# EAGLE board TLC5971 (EAGLE 6.4)
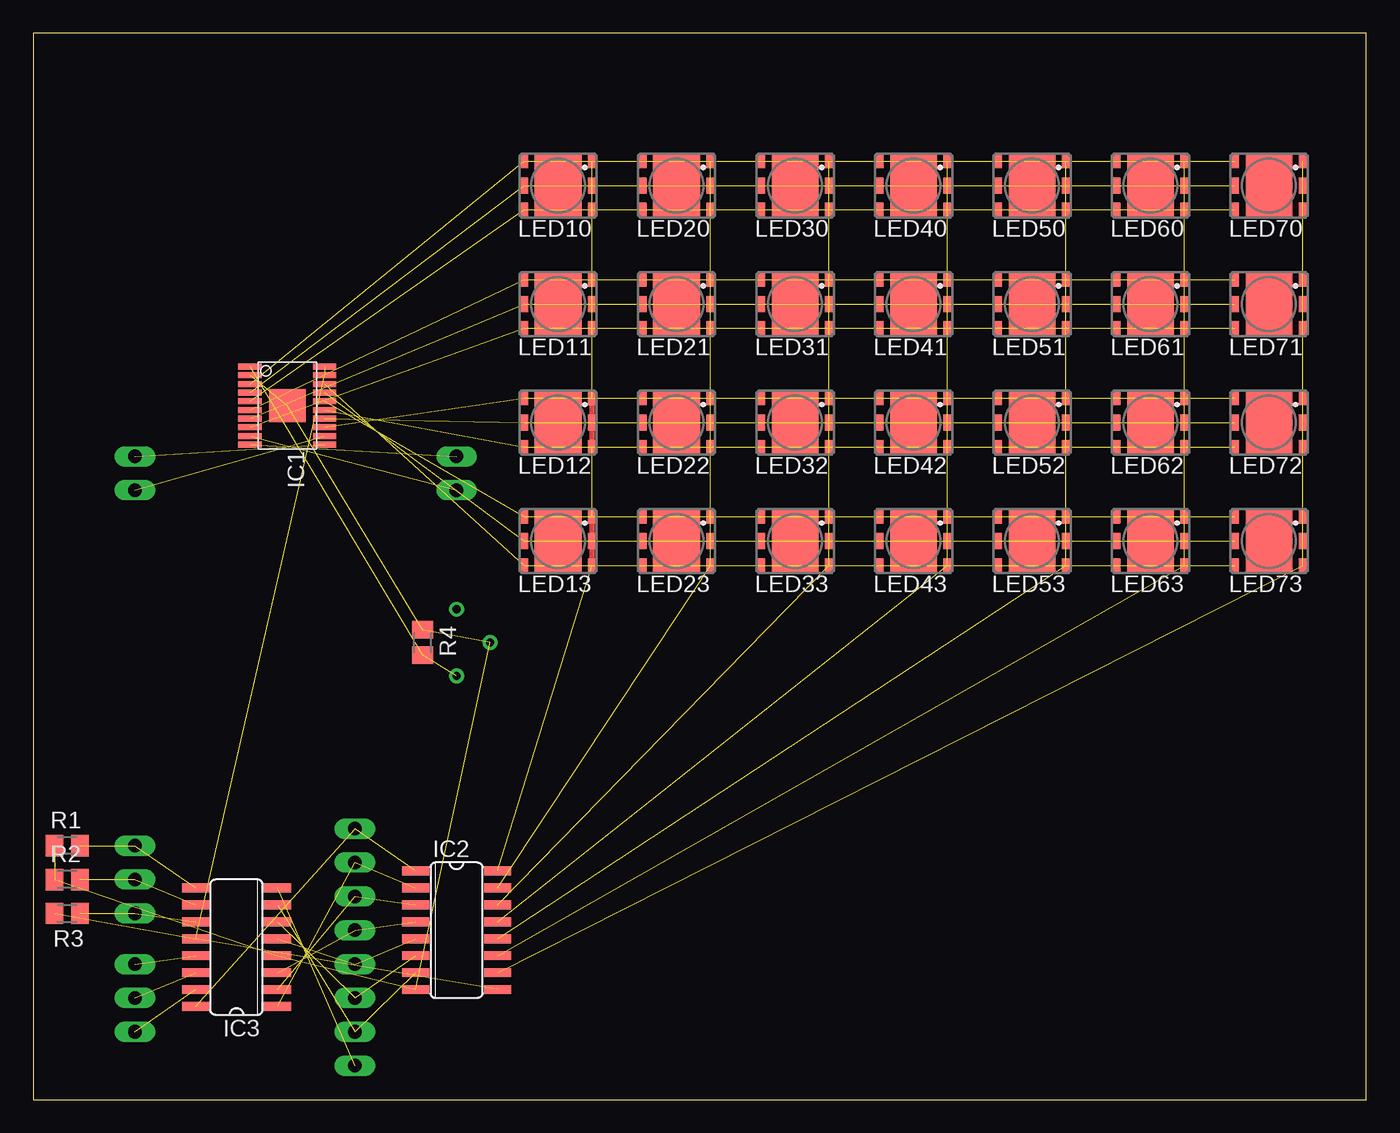
[diagram p0: board, top side]
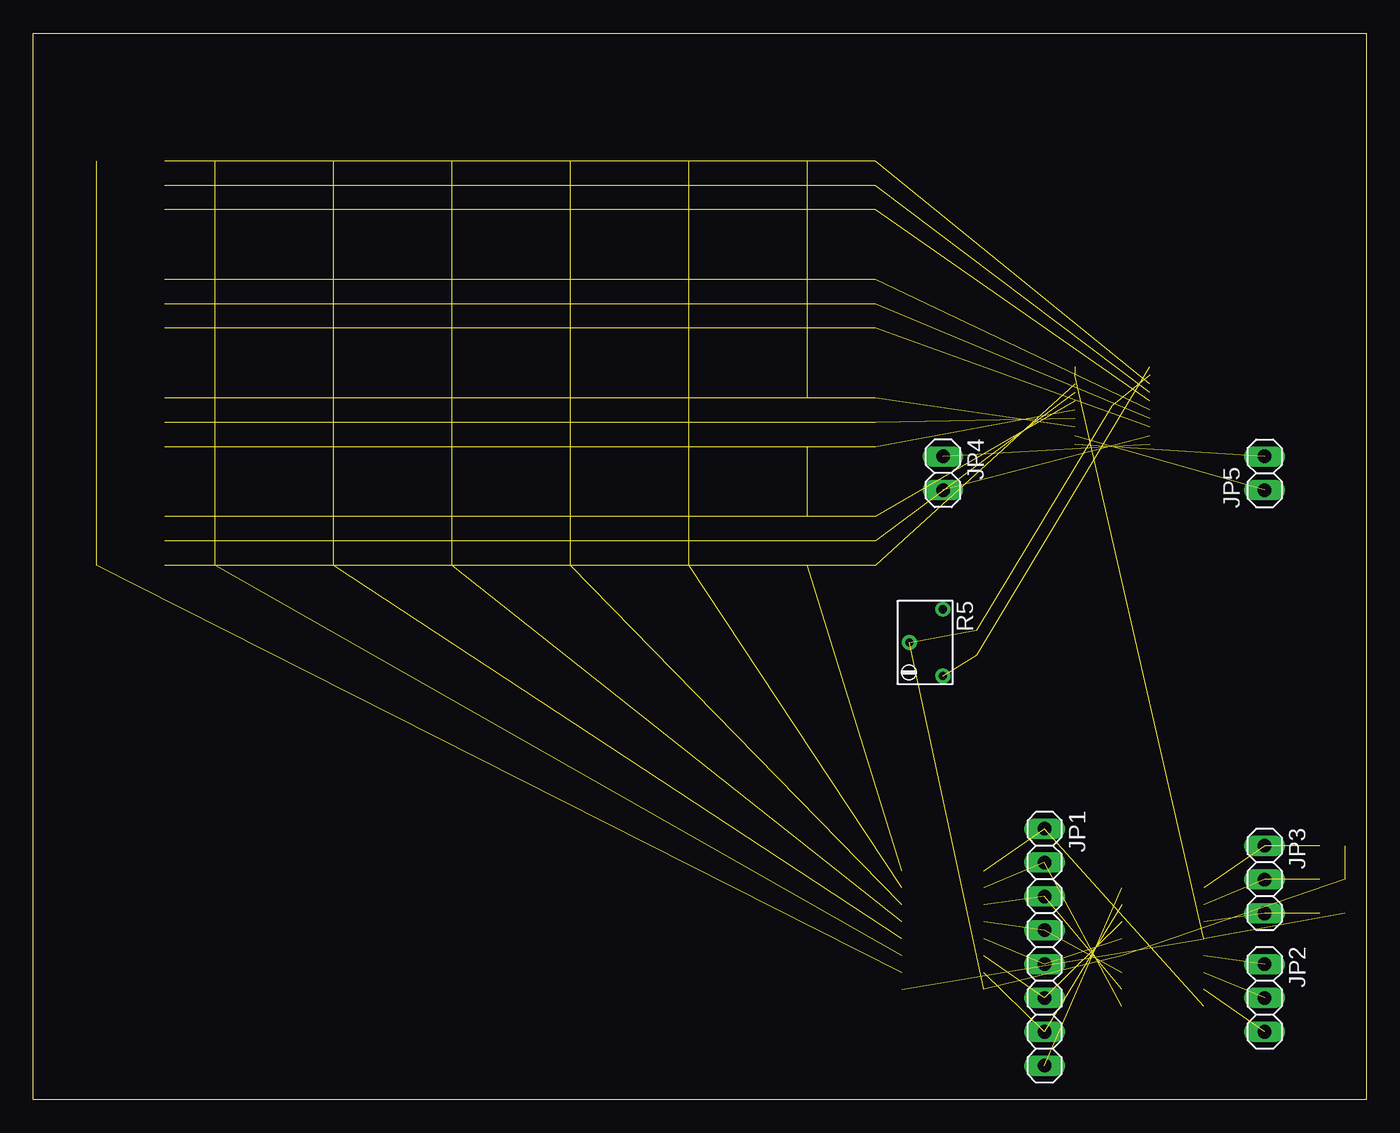
[diagram p1: board, bottom side, seen from below]

Size 100 x 80 mm. Coordinates in mm from the lower left corner, seen from the top.
Outline: 0,0 100,0 100,80 0,80 0,0
Copper layers (1*16): Top 0.035mm / dielectric 1.5mm / Bottom 0.035mm
Design rules "default": minimum track width 10mil, minimum drill 24mil, track to track 8mil, track to pad 8mil, pad to pad 8mil, via to via 8mil, smd to smd 8mil, copper to edge 40mil, drill to drill 8mil, minimum pad ring 10mil, minimum via ring 8mil, stop-mask expansion 4mil, vias tented up to drill 0mil, thermal gap 10mil

## Footprints (pad centres in the part's own frame; a part is rotated, then mirrored left to right if it is on the bottom)
HTSSOP-20(PWP) = smd 0.44 x 1.74: GND -2.275,-2.8; IREF -2.925,-2.8; OUTB0 -0.325,-2.8; OUTB1 1.625,-2.8; OUTB2 0.325,2.8; OUTB3 -1.625,2.8; OUTG0 -0.975,-2.8; OUTG1 0.975,-2.8; OUTG2 0.975,2.8; OUTG3 -0.975,2.8; OUTR0 -1.625,-2.8; OUTR1 0.325,-2.8; OUTR2 1.625,2.8; OUTR3 -0.325,2.8; SCKI 2.925,-2.8; SCKO 2.925,2.8; SDTI 2.275,-2.8; SDTO 2.275,2.8; VCC -2.275,2.8; VREG -2.925,2.8 | smd 2.5 x 2.75: PWP 0,0
SO16 = smd 0.66 x 2.032: 1 -4.445,-3.073; 2 -3.175,-3.073; 3 -1.905,-3.073; 4 -0.635,-3.073; 5 0.635,-3.073; 6 1.905,-3.073; 7 3.175,-3.073; 8 4.445,-3.073; 9 4.445,3.073; 10 3.175,3.073; 11 1.905,3.073; 12 0.635,3.073; 13 -0.635,3.073; 14 -1.905,3.073; 15 -3.175,3.073; 16 -4.445,3.073
1X08 = drill 1.016 long: 1 -8.89,0; 2 -6.35,0; 3 -3.81,0; 4 -1.27,0; 5 1.27,0; 6 3.81,0; 7 6.35,0; 8 8.89,0
1X03 = drill 1.016 long: 1 -2.54,0; 2 0,0; 3 2.54,0
1X02 = drill 1.016 long: 1 -1.27,0; 2 1.27,0
F50360 = smd 0.6 x 1.05: BA 2.55,1.825; BC -2.55,1.825; RA 2.55,-1.825; RC -2.55,-1.825 | smd 0.6 x 1.2: GA 2.55,0; GC -2.55,0 | smd 3.5 x 4.7: NC 0,0
M0805 = smd 1.3 x 1.6: 1 -0.95,0; 2 0.95,0
RTRIM74W = drill 0.61: 1 -1.25,-2.5; 2 1.25,0; 3 -1.25,2.5

## Placement (x,y rotation side)
IC1  TLC5971  [HTSSOP-20(PWP)]  19.05,52.07 270 top
IC2  ULN2003AD  [SO16]  31.75,12.7 270 top
IC3  74AC11238D  [SO16]  15.24,11.43 90 top
JP1  [1X08]  24.13,11.43 270 bottom
JP2  [1X03]  7.62,7.62 270 bottom
JP3  [1X03]  7.62,16.51 270 bottom
JP4  [1X02]  31.75,46.99 270 bottom
JP5  [1X02]  7.62,46.99 90 bottom
LED10  F50360  [F50360]  39.37,68.58 180 top
LED11  F50360  [F50360]  39.37,59.69 180 top
LED12  F50360  [F50360]  39.37,50.8 180 top
LED13  F50360  [F50360]  39.37,41.91 180 top
LED20  F50360  [F50360]  48.26,68.58 180 top
LED21  F50360  [F50360]  48.26,59.69 180 top
LED22  F50360  [F50360]  48.26,50.8 180 top
LED23  F50360  [F50360]  48.26,41.91 180 top
LED30  F50360  [F50360]  57.15,68.58 180 top
LED31  F50360  [F50360]  57.15,59.69 180 top
LED32  F50360  [F50360]  57.15,50.8 180 top
LED33  F50360  [F50360]  57.15,41.91 180 top
LED40  F50360  [F50360]  66.04,68.58 180 top
LED41  F50360  [F50360]  66.04,59.69 180 top
LED42  F50360  [F50360]  66.04,50.8 180 top
LED43  F50360  [F50360]  66.04,41.91 180 top
LED50  F50360  [F50360]  74.93,68.58 180 top
LED51  F50360  [F50360]  74.93,59.69 180 top
LED52  F50360  [F50360]  74.93,50.8 180 top
LED53  F50360  [F50360]  74.93,41.91 180 top
LED60  F50360  [F50360]  83.82,68.58 180 top
LED61  F50360  [F50360]  83.82,59.69 180 top
LED62  F50360  [F50360]  83.82,50.8 180 top
LED63  F50360  [F50360]  83.82,41.91 180 top
LED70  F50360  [F50360]  92.71,68.58 180 top
LED71  F50360  [F50360]  92.71,59.69 180 top
LED72  F50360  [F50360]  92.71,50.8 180 top
LED73  F50360  [F50360]  92.71,41.91 180 top
R1  [M0805]  2.54,19.05 0 top
R2  [M0805]  2.54,16.51 0 top
R3  [M0805]  2.54,13.97 180 top
R4  [M0805]  29.21,34.29 270 top
R5  [RTRIM74W]  33.02,34.29 180 bottom

## Library data of the parts
IC1 = BEEP
IC2 = uln-udn
IC3 = 74ac-logic
JP1-JP5 = pinhead
LED10-LED13 LED20-LED23 LED30-LED33 LED40-LED43 LED50-LED53 LED60-LED63 LED70-LED73 = led
R1-R5 = rcl

## Nets
B0: IC1.OUTB0 LED10.BA LED20.BA LED30.BA LED40.BA LED50.BA LED60.BA LED70.BA
B1: IC1.OUTB1 LED11.BA LED21.BA LED31.BA LED41.BA LED51.BA LED61.BA LED71.BA
B2: IC1.OUTB2 LED12.BA LED22.BA LED32.BA LED42.BA LED52.BA LED62.BA LED72.BA
B3: IC1.OUTB3 LED13.BA LED23.BA LED33.BA LED43.BA LED53.BA LED63.BA LED73.BA
G0: IC1.OUTG0 LED10.GA LED20.GA LED30.GA LED40.GA LED50.GA LED60.GA LED70.GA
G1: IC1.OUTG1 LED11.GA LED21.GA LED31.GA LED41.GA LED51.GA LED61.GA LED71.GA
G2: IC1.OUTG2 LED12.GA LED22.GA LED32.GA LED42.GA LED52.GA LED62.GA LED72.GA
G3: IC1.OUTG3 LED13.GA LED23.GA LED33.GA LED43.GA LED53.GA LED63.GA LED73.GA
GND: IC1.GND IC1.PWP IC2.8 IC3.4 R1.1 R2.1 R4.1 R5.2
N$1: IC2.1 IC3.16 JP1.1
N$2: IC2.2 IC3.1 JP1.2
N$3: IC2.3 IC3.2 JP1.3
N$4: IC2.4 IC3.3 JP1.4
N$5: IC2.5 IC3.5 JP1.5
N$6: IC2.6 IC3.6 JP1.6
N$7: IC2.7 IC3.7 JP1.7
N$8: IC3.8 JP1.8
N$9: IC3.9 JP3.1 R1.2
N$10: IC3.10 JP3.2 R2.2
N$11: IC3.11 JP3.3 R3.1
N$12: IC3.15 JP2.3
N$13: IC3.14 JP2.2
N$14: IC3.13 JP2.1
N$15: IC2.12 LED50.BC LED50.GC LED50.RC LED51.BC LED51.GC LED51.RC LED52.BC LED52.GC LED52.RC LED53.BC LED53.GC LED53.RC
N$16: IC2.11 LED60.BC LED60.GC LED60.RC LED61.BC LED61.GC LED61.RC LED62.BC LED62.GC LED62.RC LED63.BC LED63.GC LED63.RC
N$17: IC2.10 LED70.BC LED70.GC LED70.RC LED71.BC LED71.GC LED71.RC LED72.BC LED72.GC LED72.RC LED73.BC LED73.GC LED73.RC
N$18: IC2.13 LED40.BC LED40.GC LED40.RC LED41.BC LED41.GC LED41.RC LED42.BC LED42.GC LED42.RC LED43.BC LED43.GC LED43.RC
N$19: IC2.14 LED30.BC LED30.GC LED30.RC LED31.BC LED31.GC LED31.RC LED32.BC LED32.GC LED32.RC LED33.BC LED33.GC LED33.RC
N$20: IC2.15 LED20.BC LED20.GC LED20.RC LED21.BC LED21.GC LED21.RC LED22.BC LED22.GC LED22.RC LED23.BC LED23.GC LED23.RC
N$21: IC2.16 LED10.BC LED10.GC LED10.RC LED11.BC LED11.GC LED11.RC LED12.BC LED12.GC LED12.RC LED13.BC LED13.GC LED13.RC
N$22: IC1.SDTI JP4.2
N$23: IC1.SCKI JP4.1
N$24: IC1.SCKO JP5.2
N$25: IC1.SDTO JP5.1
N$26: IC1.IREF R4.2 R5.3
R0: IC1.OUTR0 LED10.RA LED20.RA LED30.RA LED40.RA LED50.RA LED60.RA LED70.RA
R1: IC1.OUTR1 LED11.RA LED21.RA LED31.RA LED41.RA LED51.RA LED61.RA LED71.RA
R2: IC1.OUTR2 LED12.RA LED22.RA LED32.RA LED42.RA LED52.RA LED62.RA LED72.RA
R3: IC1.OUTR3 LED13.RA LED23.RA LED33.RA LED43.RA LED53.RA LED63.RA LED73.RA
VCC: IC1.VCC IC1.VREG IC2.9 IC3.12 R3.2

## Tracks (layer width: path | path; a pad name or v marks a point on that pad's centre or on a via)
B0  (7 unrouted)
B1  (7 unrouted)
B2  (7 unrouted)
B3  (7 unrouted)
G0  (7 unrouted)
G1  (7 unrouted)
G2  (7 unrouted)
G3  (7 unrouted)
GND  (7 unrouted)
N$1  (2 unrouted)
N$2  (2 unrouted)
N$3  (2 unrouted)
N$4  (2 unrouted)
N$5  (2 unrouted)
N$6  (2 unrouted)
N$7  (2 unrouted)
N$8  (1 unrouted)
N$9  (2 unrouted)
N$10  (2 unrouted)
N$11  (2 unrouted)
N$12  (1 unrouted)
N$13  (1 unrouted)
N$14  (1 unrouted)
N$15  (12 unrouted)
N$16  (12 unrouted)
N$17  (12 unrouted)
N$18  (12 unrouted)
N$19  (12 unrouted)
N$20  (12 unrouted)
N$21  (8 unrouted)
  Top 0.406: LED13.BC LED13.GC LED13.RC | LED12.BC LED12.GC LED12.RC
N$22  (1 unrouted)
N$23  (1 unrouted)
N$24  (1 unrouted)
N$25  (1 unrouted)
N$26  (2 unrouted)
R0  (7 unrouted)
R1  (7 unrouted)
R2  (7 unrouted)
R3  (7 unrouted)
VCC  (4 unrouted)